# Altium PCB PCB1.PcbDoc
Units mil, origin at the board's own origin, x right, y up, seen from the top; angles counter-clockwise.
Board outline 1970.47 x 3548.03 mil, 4 copper layers (Top Layer, GND, VCC, Bottom Layer), stack 61.811 mil thick; 45 components, 44 nets, 212 pads, 77 vias.
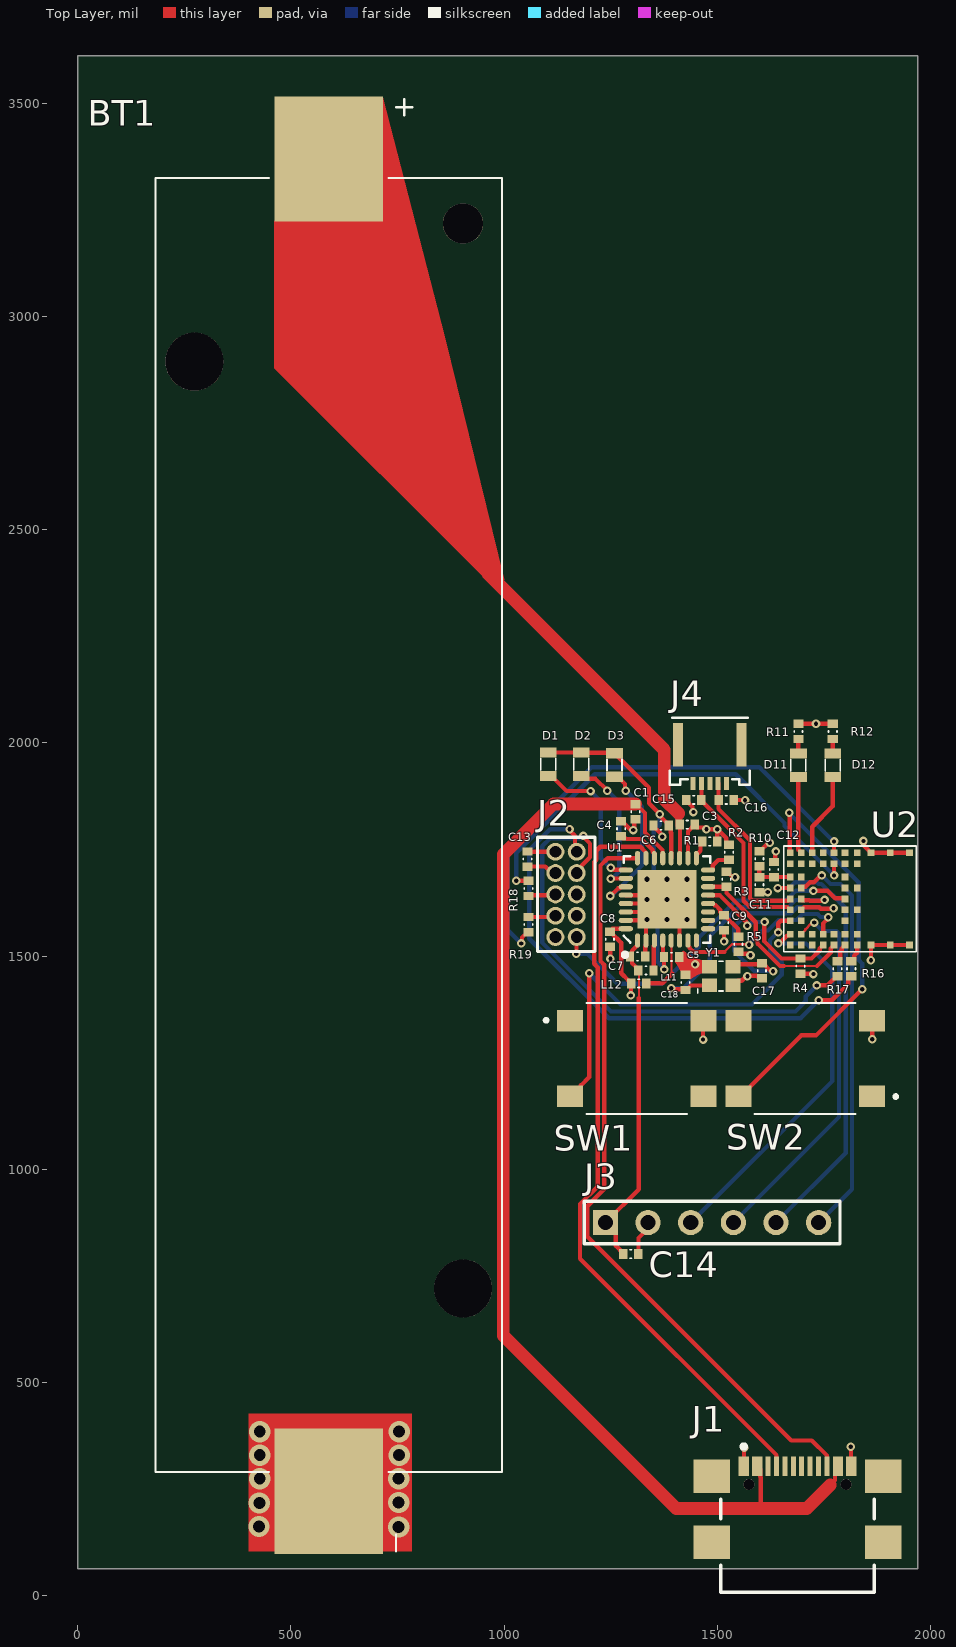
[diagram p0: Top Layer view]
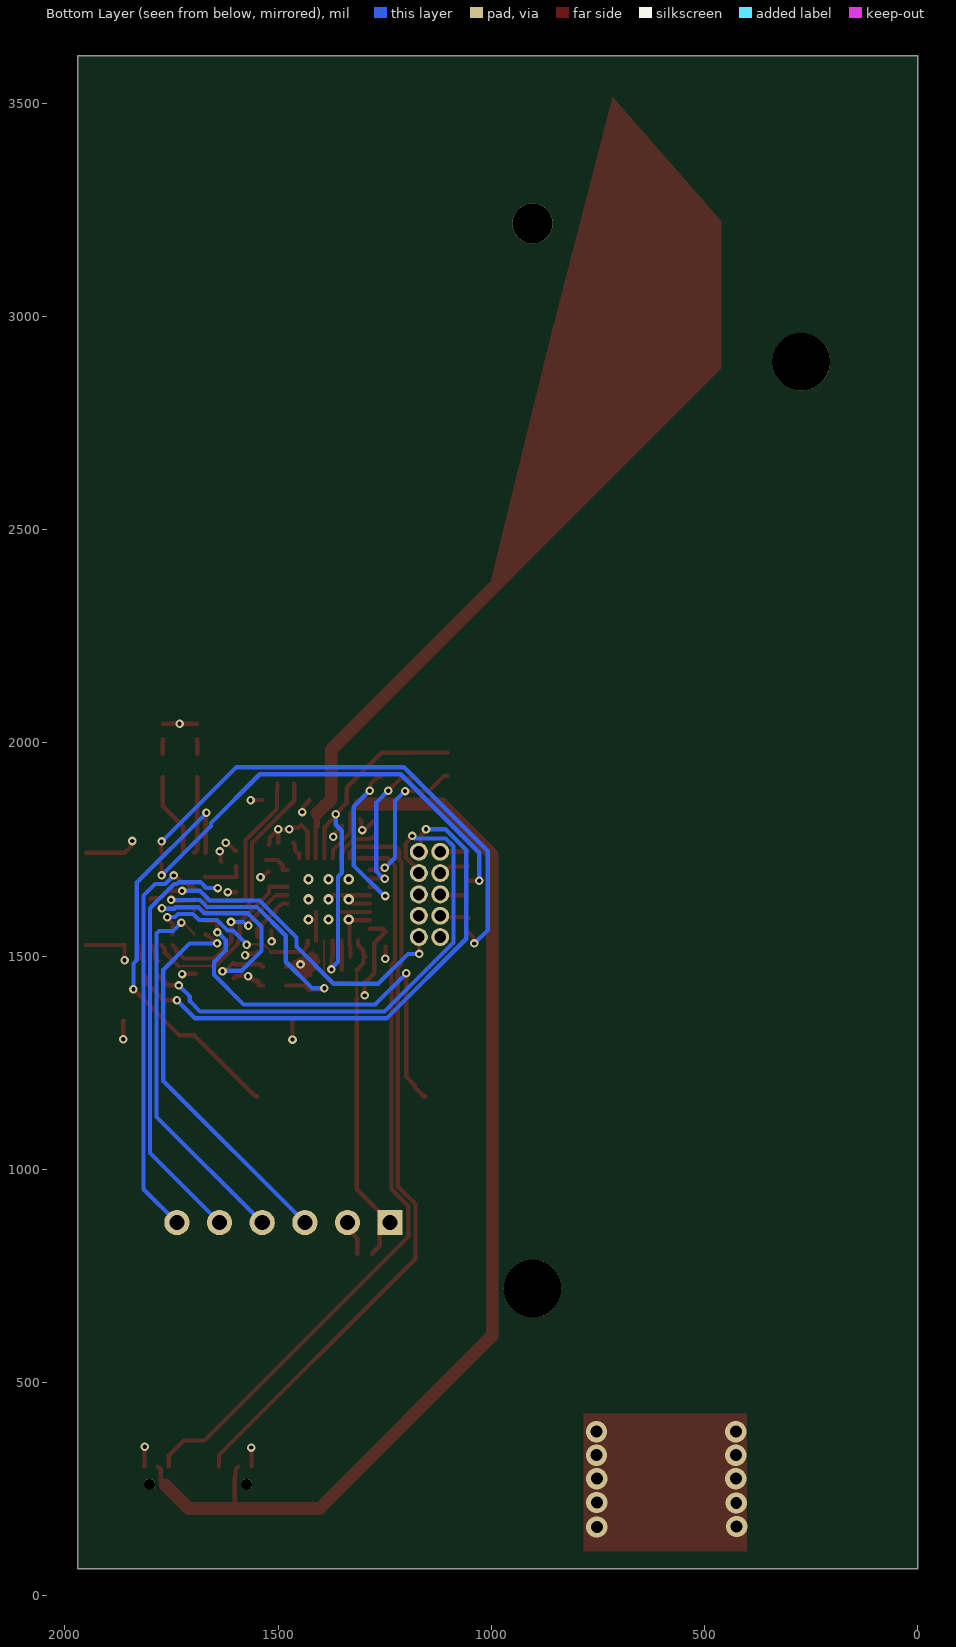
[diagram p1: Bottom Layer view, seen from below]
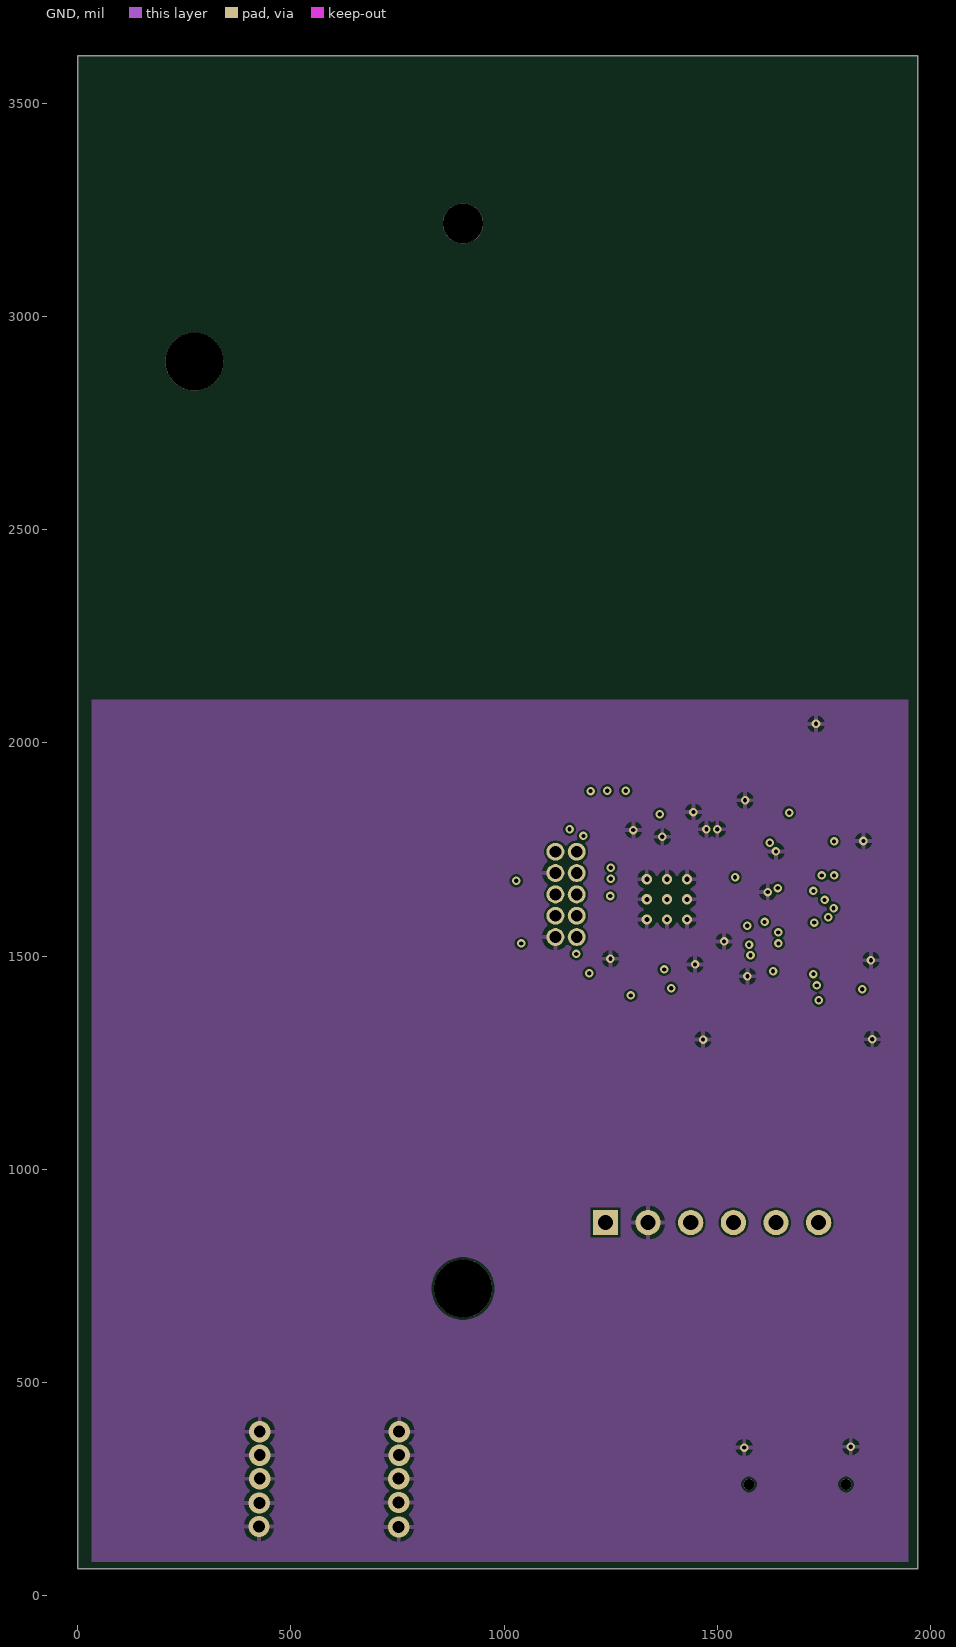
[diagram p2: GND]
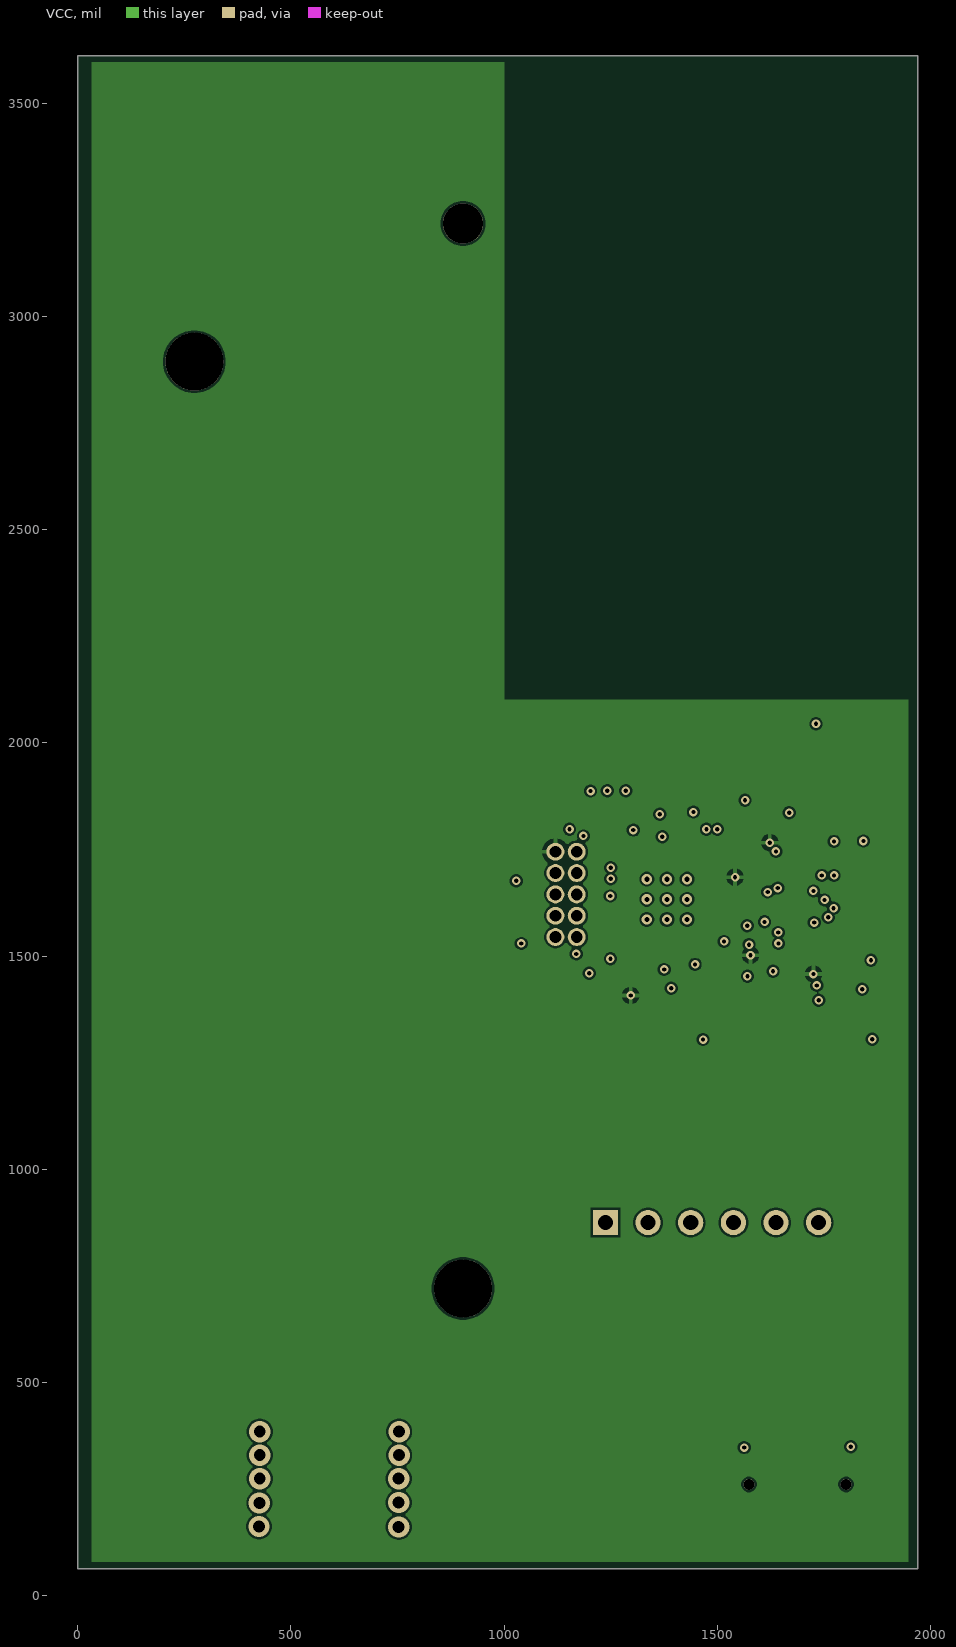
[diagram p3: VCC]
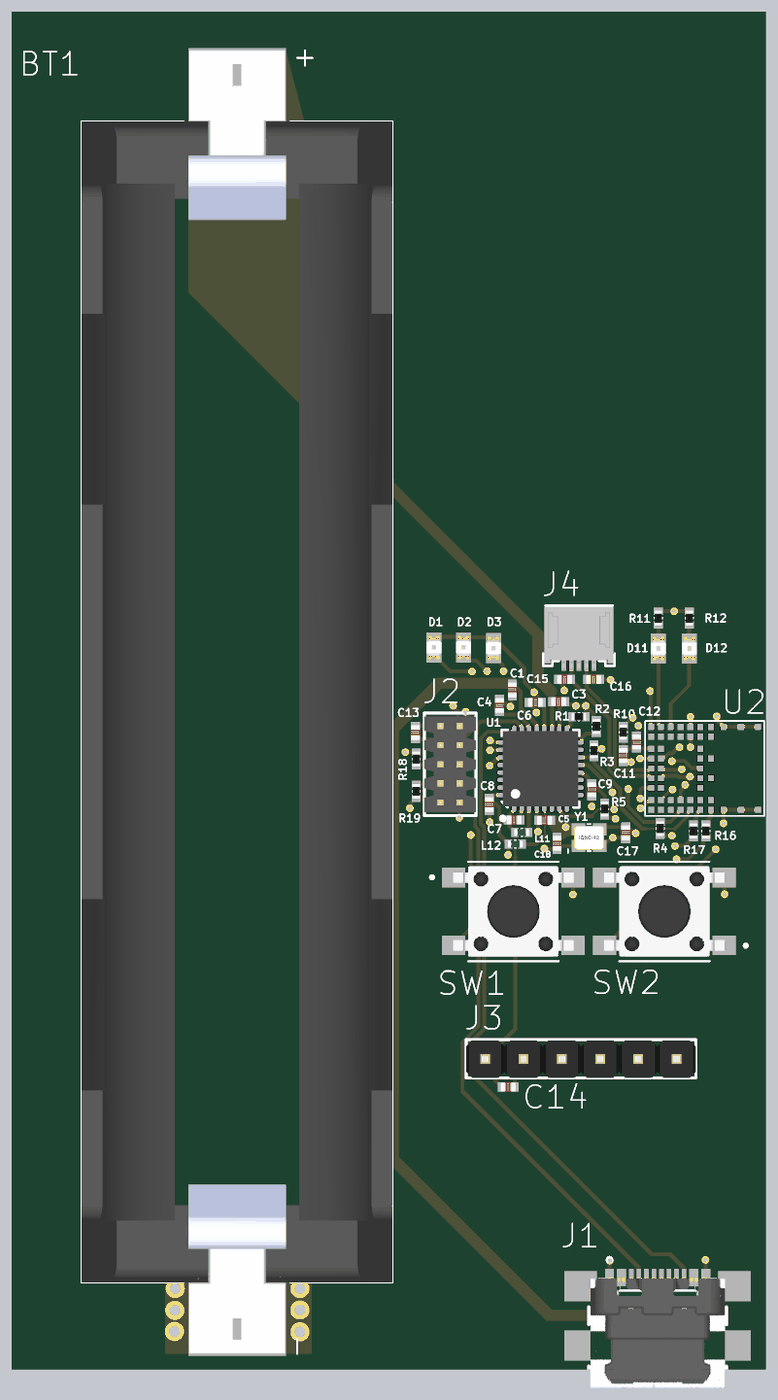
[diagram p4: 3D render of the assembled board from above, using the file's embedded part models]

## Layer stack, top to bottom
Top Solder: solder mask 0.3937, SM-001, Dk 4
Top Layer: signal copper 1.378
Prepeg_Top1: prepreg 7.0866, PP-021, Dk 4.7
Prepeg_Top2: prepreg 7.0866, PP-021, Dk 4.7
GND: signal copper 1.378
Core Dielectric: core 27.9528, FR-4, Dk 4.8
VCC: signal copper 1.378
Prepeg_Bottom2: prepreg 7.0866, PP-021, Dk 4.7
Prepeg_Bottom1: prepreg 7.0866, PP-021, Dk 4.7
Bottom Layer: signal copper 1.378
Bottom Solder: solder mask 0.3937, SM-001, Dk 4

## Board outline
0,63.19 1970.47,63.19 1970.47,3611.22 0,3611.22

## Design rules (kind name [scope] priority, off if disabled: settings)
Clearance [All] p1: gap=5 ignorepadtopadclearanceinfootprint=FALSE except(9: Arc-Hole Track-Hole SMDPad-Hole)
HoleSize [All] p1: absolutevalues=TRUE maxlimit=10000 minlimit=9.84 maxpercent=80.000 minpercent=20.000
MinimumAnnularRing [All] p1: minimumring=5
MinimumSolderMaskSliver [All] p1: minsoldermaskwidth=5
PolygonConnect [All] p1: connectstyle=Relief reliefconductorwidth=10 reliefentries=4 polygonreliefangle="90 Angle" airgapwidth=10
RoutingVias [All] p1: holewidth=28 width=5 viastyle="Through Hole" minholewidth=5.91 minwidth=4 maxholewidth=3937.01 maxwidth=5000
SilkToSilkClearance [All] p1: silktosilkclearance=5
SilkToSolderMaskClearance [IsPad] p1: minsilkscreentomaskgap=5 clearancetoexposedcopper=TRUE
SolderMaskExpansion [All] p1: expansion=0 istentingtop=FALSE
SupplyNets "Schematic Supply Nets_3" [InNet('VCC2')] p1: voltage=0.000
SupplyNets "Schematic Supply Nets_2" [InNet('GND')] p2: voltage=0.000
SupplyNets "Schematic Supply Nets_1" [InNet('VSYS')] p3: voltage=0.000
SupplyNets "Schematic Supply Nets" [InNet('VCC1')] p4: voltage=0.000
Width [All] p1: maxlimit=30 minlimit=5 preferedwidth=10
26 further rules are at their usual default settings.

## Classes and differential pairs
component class U_Zasilanie: BT1 C1 C3 C4 C5 C6 C7 C8 C9 D1 D2 D3 J1 L11 L12 R1 R2 R3 R4 R5 U1
component class U_MCU: C11 C12 C13 C14 C15 C16 C17 C18 D11 D12 J2 J3 J4 R10 R11 R12 R16 R17 R18 R19 SW1 SW2 U2 Y1

## Components (designator, comment, footprint, x,y, rotation, side; value= is the part's Value field where it differs from the comment)
BT1 "1042" BAT_1042 588.84,1807.09 r90 top
C1 "1uF" 0402C 1308.07,1838.58 r270 top
C3 "2,2uF" 0402C 1429.13,1808.07 r0 top
C4 "1uF" 0402C 1274.61,1798.23 r270 top
C5 "10uF" 0402C 1392.72,1498.03 r180 top
C6 "10uF" 0402C 1368.11,1806.1 r0 top
C7 "10uF" 0402C 1312.99,1499.02 r180 top
C8 "10uF" 0402C 1248.03,1539.37 r90 top
C9 "100nF" 0402C 1515.75,1577.76 r270 top
C11 "10uF" 0402C 1598.43,1667.32 r90 top
C12 "100nF" 0402C 1632.87,1702.76 r270 top
C13 "100nF" 0402C 1055.12,1727.36 r270 top
C14 "100nF" 0402C 1297.24,801.18 r0 top
C15 "1uF" 0402C 1444.88,1866.14 r180 top
C16 "1uF" 0402C 1520.67,1866.14 r180 top
C17 "12pF" 0402C 1604.33,1465.55 r90 top
C18 "12pF" 0402C 1425.2,1437.99 r270 top
D1 "LED" 0603LED_RED 1103.35,1949.8 r90 top
D2 "LED" 0603LED_RED 1181.1,1949.8 r90 top
D3 "LED" 0603LED_RED 1258.86,1947.83 r90 top
D11 "LED" 0603LED_RED 1689.96,1946.85 r270 top
D12 "LED" 0603LED_RED 1770.67,1946.85 r270 top
J1 "USB4110-GF-A" FP-USB4110-GF-A-MFG 1687.99,158.46 r0 top
J2 "Cortex Debug Conn_UART" "Cortex Debug Connector - THT" 1145.28,1644.49 r0 top
J3 "HDR_2.54_6x1" "HDR 2.54MM 1x6" 1237.6,875 r0 top
J4 "Compatible with Nordic NFC antenna" FPC_05P-0.5mm-RA-SMD 1521.65,1904.53 r180 top value="FPC 0.5mm RA SMD"
L11 "2,2uH" 0402L 1332.68,1466.54 r0 top
L12 "2,2uH" 0402L 1315.94,1436.02 r0 top
R1 "0R" 0402R 1482.28,1768.7 r0 top
R2 "250k - 500k" 0402R 1527.56,1743.11 r90 top
R3 "10k" 0402R 1521.65,1680.12 r270 top
R4 "10k" 0402R 1694.88,1476.38 r90 top
R5 "0R" 0402R 1549.21,1527.56 r270 top
R10 "0R" 0402R 1598.43,1728.35 r90 top
R11 "1,5k" 0402R 1689.96,2026.57 r90 top
R12 "1,5k" 0402R 1770.67,2026.57 r90 top
R16 "100R" 0402R 1813.98,1470.47 r270 top
R17 "100R" 0402R 1781.5,1470.47 r270 top
R18 "100R" 0402R 1057.09,1658.46 r90 top
R19 "100R" 0402R 1057.09,1573.82 r270 top
SW1 "SWITCH_TACT" "TACT - SMD" 1311.02,1259.84 r0 top
SW2 "SWITCH_TACT" "TACT - SMD" 1705.71,1259.84 r180 top
U1 "nPM1304-QEAA" Nordic_QFN50P500X500X90-33N 1381.89,1632.87 r90 top
U2 "BL54L15u_Ant" "Ezurio, BL54L15u Module, Antenna, Platform Side" 1655.51,1509.84 r0 top
Y1 "XTAL 2.0 1.6" "XTAL 2.0 1.6" 1508.86,1452.76 r0 top

## Footprints (in the part's own frame and the unit in brackets; to place one, negate y for a bottom-side part, rotate by r counter-clockwise, add the part's x,y. Pads: shape width x height; smd on the part's side, far side on the other; paste and mask are expansions set on the pad)
0402C [mm]
  rect 0.5x0.6 smd: 1(0.45,0) 2(-0.45,0)
  silkscreen extent -0.05,-0.25 0.05,0.25, body extent -0.5,-0.3 0.5,0.3, height 0.2
0402L [mm]
  rect 0.5x0.6 smd: 1(0.45,0) 2(-0.45,0)
  silkscreen extent -0.05,-0.25 0.05,0.25, body extent -0.51,-0.25 0.51,0.25, height 0.52
0402R [mm]
  rect 0.5x0.6 smd: 1(0.45,0) 2(-0.45,0)
  silkscreen extent -0.05,-0.25 0.05,0.25, body extent -0.5,-0.25 0.5,0.25, height 0.3
0603LED_RED [mm]
  rect 0.6x1 smd: 1(-0.7,0) 2(0.7,0)
  silkscreen extent -0.35,-0.45 0.35,0.45, body extent -0.8,-0.4 0.8,0.4, height 0.55
BAT_1042 [mm]
  rect 7.46x6.47 smd: N(-39.67,0) P(39.67,0)
  round 3.45 hole 3.45 unplated: ""(-27.6,-8) ""(27.6,8)
  round 2.39 hole 2.39 unplated: ""(35.82,-8)
  silkscreen extent -43.25,-10.33 43.25,10.33, body extent -43.23,-10.33 43.23,10.33, height 14.86
"Cortex Debug Connector - THT" [mm]
  round 1.067 hole 0.7: 1(-0.635,2.54) 2(0.635,2.54) 3(-0.635,1.27) 4(0.635,1.27) 5(-0.635,0) 6(0.635,0) 7(-0.635,-1.27) 8(0.635,-1.27) 9(-0.635,-2.54) 10(0.635,-2.54)
  silkscreen extent -1.7,-3.4 1.73,3.4, body extent -1.71,-3.17 1.71,3.17, height 6.34
"Ezurio, BL54L15u Module, Antenna, Platform Side" [mm] "Ezurio, BL54L15u Module, Platform Side"
  rect 0.4x0.4 smd paste+0 mask+0.051: 1(0.4,5.9) 2(1.05,5.9) 3(0.4,5.25) 4(1.05,5.25) 5(0.4,4.45) 6(1.05,4.45) 7(0.4,3.8) 8(1.05,3.8) 9(0.4,3.15) 10(1.05,3.15) 11(0.4,2.5) 12(1.05,2.5) 13(0.4,1.85) 14(1.05,1.85) 15(0.4,1.05) 16(1.05,1.05) 17(0.4,0.4) 18(1.05,0.4) 19(1.7,0.4) 20(1.7,1.05) 21(2.35,0.4) 22(2.35,1.05) 23(3,0.4) 24(3,1.05) 25(3.65,0.4) 26(3.65,1.05) 27(4.375,0.4) 28(4.375,1.05) 29(3.65,1.85) 30(3.65,2.5) 31(4.375,2.5) 32(3.65,3.15) 33(3.65,3.8) 34(4.375,3.8) 35(3.65,4.45) 36(4.375,5.25) 37(4.375,5.9) 38(3.65,5.25) 39(3.65,5.9) 40(3,5.25) 41(3,5.9) 42(2.35,5.25) 43(2.35,5.9) 44(1.7,5.25) 45(1.7,5.9) G1(5.2,5.9) G2(6.35,5.9) G3(7.5,5.9) G4(5.2,0.4) G5(6.35,0.4) G6(7.5,0.4)
  Top Layer pour cut-out: 4.9,5.65 4.9,5.65 4.9,0.65 7.9,0.65 7.9,5.65
  silkscreen extent 0,0 7.9,6.3, body extent 0,0 7.9,6.3, height 1.75
FP-USB4110-GF-A-MFG [mm]
  rect 2.18x2 smd paste+0 mask+0: 1(-5.11,3.105) 2(5.11,3.105) 3(-5.11,-0.825) 4(5.11,-0.825)
  rect 0.6x1.15 smd paste+0 mask+0: A1-B12(-3.2,3.68) A4-B9(-2.4,3.68) B1-A12(3.2,3.68) B4-A9(2.4,3.68)
  rect 0.3x1.15 smd paste+0 mask+0: A5(-1.25,3.68) A6(-0.25,3.68) A7(0.25,3.68) A8(1.25,3.68) B5(1.75,3.68) B6(0.75,3.68) B7(-0.75,3.68) B8(-1.75,3.68)
  round 0.65 hole 0.65 unplated paste-2539.97 mask+0: ""(-2.89,2.605) ""(2.89,2.605)
  silkscreen extent -4.57,-3.83 4.57,4.99, body extent -6.3,-3.92 6.3,4.36, height 0.25
FPC_05P-0.5mm-RA-SMD [mm] "FPC, 5-Leads, Pitch 0,5mm"
  rect 0.6x2.6 smd: 0(-0.9,-2.3) 0(2.9,-2.3)
  rect 0.3x0.8 smd mask+0.05: 1(0,0) 2(0.5,0) 3(1,0) 4(1.5,0) 5(2,0)
  silkscreen extent -1.38,-3.93 3.38,0.08, body extent -1.3,-3.85 3.3,0.2, height 1.2
"HDR 2.54MM 1x6" [mm] "Connector; Header; 6 Position"
  rect 1.5x1.5 hole 0.9: 1(0,0)
  round 1.5 hole 0.9: 2(2.54,0) 3(5.08,0) 4(7.62,0) 5(10.16,0) 6(12.7,0)
  silkscreen extent -1.27,-1.27 13.97,1.27, body extent -1.27,-1.28 13.97,1.22, height 10.54
Nordic_QFN50P500X500X90-33N [mm]
  oval 0.85x0.3 smd mask+0.076: 1(-2.45,1.75) 2(-2.45,1.25) 3(-2.45,0.75) 4(-2.45,0.25) 5(-2.45,-0.25) 6(-2.45,-0.75) 7(-2.45,-1.25) 8(-2.45,-1.75) 17(2.45,-1.75) 18(2.45,-1.25) 19(2.45,-0.75) 20(2.45,-0.25) 21(2.45,0.25) 22(2.45,0.75) 23(2.45,1.25) 24(2.45,1.75)
  oval 0.3x0.85 smd mask+0.076: 9(-1.75,-2.45) 10(-1.25,-2.45) 11(-0.75,-2.45) 12(-0.25,-2.45) 13(0.25,-2.45) 14(0.75,-2.45) 15(1.25,-2.45) 16(1.75,-2.45) 25(1.75,2.45) 26(1.25,2.45) 27(0.75,2.45) 28(0.25,2.45) 29(-0.25,2.45) 30(-0.75,2.45) 31(-1.25,2.45) 32(-1.75,2.45)
  rect 3.5x3.5 smd: 33(0,0)
  silkscreen extent -3.42,-2.57 2.57,2.62, body extent -2.5,-2.5 2.5,2.5, height 0.9
"TACT - SMD" [mm]
  rect 1.55x1.3 smd: 1(-3.975,2.25) 2(3.975,2.25) 3(-3.975,-2.25) 4(3.975,-2.25)
  silkscreen extent -5.5,-3.3 3,3.3, body extent -4,-3 4,3, height 5
"XTAL 2.0 1.6" [mm]
  rect 0.9x0.8 smd: 1(-0.7,-0.55) 2(0.7,-0.55) 3(0.7,0.55) 4(-0.7,0.55)
  silkscreen extent -1.4,-1.02 0.13,0.89, body extent -1,-0.8 1,0.8, height 0.51

## Part data
BT1: "SMT Holder for 18650 Battery", Package="NON STANDARD-5 Keystone", Check_prices=https://www.snapeda.com/parts/1042/Keystone/view-part/?ref=eda, MF="Keystone Electronics Corp.", MP=1042, SnapEDA_Link=https://www.snapeda.com/parts/1042/Keystone/view-part/?ref=snap
C1 C3 C4 C5 C6 C7 C8 C9 C11 C12 C13 C14 C15 C16 C17 C18: library part C, "Capacitor"
J1: library part USB-C, "USB-C Connector, CMP-245163-000002-1", Current Rating=3/4.25/1.25/0.25A, Manufacturer=GCT, Package=0, Temperature="-40°C to +85°C", Temperature Range High=+85°C, Temperature Range Low=-40°C, Voltage Rating=20V, Automotive=No, Category=Conn, ComponentLink2Description=Datasheet, ComponentLink2URL=https://gct.co/files/drawings/usb4110.pdf, Conn Orientation="Right Angle", Contact Material=Gold,Nickel, Device Class L1=Connectors, Device Class L2="USB Connectors", Device Class L3=unset, Digikey Description="CONN USB 2.0 TYPE-C R/A SMT", Height=3.46mm, Is Female=yes, Lead Free=Yes, Manufacturer Part Number=USB4110-GF-A, Number Of Contacts=16, Octopart=https://octopart.com/usb4110-gf-a-gct-103941985, RoHS=TRUE, Shielding=true, Standoff Height=0.1mm, Usb Standard="USB 2.0"
J2: "JTAG10 Connector"
J3: "Header 2.54, 6-Pin", LatestRevisionDate=17-Jul-2002, LatestRevisionNote="Re-released for DXP Platform.", Publisher="Altium Limited"
J4: library part NFC_CONN, "0.5mm FPC, 5P,Right Angle SMT,Double Contact,H=1.2mm,White, Tin plated", Manufacturer=WCON, Manufacturer Part Number=5141-05RZDNWR03, Part Number=FPC_05P-0.5mm-RA-SMD, Part number IPS=N.A., Part number NEMS=100500528, Artikkelnr Noca=N.A., Author=rsk, Component Class=Connectors, Component Status=Active, ComponentLink1Description=Datasheet, ComponentLink1URL=N.A., ComponentLink2Description="Supplier link", ComponentLink2URL=N.A., Footprint Doc=FPC_05P-0.5mm-RA-SMD, HelpURL=\\hizz\pro\app9717\Datasheet\connectors\W-CON\5141-05RZDNXX02.pdf, LatestRevisionDate=2024-02-02, Note="(Replaced 5141-05RZDNWR02)", Pad Count=7, Part number Norautron=N.A., PartId=100500528, Published=2015-06-22, Supplier 1=Cabcon, Supplier 2=N.A., Supplier Part Number 1=5141-05RZDNWR03, Supplier Part Number 2=N.A., System=Connector
L11 L12: library part L, "Inductor"
R1 R2 R3 R4 R5 R10 R11 R12 R16 R17 R18 R19: library part R, "Resistor"
SW1 SW2: "Switch tact"
U1: library part nPM1304_QEAA, "Li-Ion/Li-Polymer USB-C battery charger with high efficiency buck regulators, LDOs or load switches, LED drivers, TWI and VBUSOUT", Manufacturer="Nordic Semiconductor", Part number IPS=N.A., Part number NEMS=102000396, Artikkelnr Noca=N.A., Author=eisk, Component Class=Nordic_Devices, Component Status=Active, ComponentLink1Description=Datasheet, ComponentLink1URL=N.A., ComponentLink2Description="Supplier link", ComponentLink2URL=N.A., Footprint Doc=QFN-32, HelpURL=N.A., LatestRevisionDate=2025-03-07, Manufacturer Part Number=nPM1304-QEAA, Pad Count=33, Part Number=nPM1304-QEAA, Part number Norautron=N.A., PartId=102000396, Published=2025-03-07, Supplier 1="Nordic Semiconductor", Supplier 2=N.A., Supplier Part Number 1=nPM1304-QEAA, Supplier Part Number 2=N.A.
U2: "453-00223_BL54L15u_Chip ANT_SCH_Symbol_Altium"
Y1: "XTAL"

## Via types
v1: diameter 20, hole 10, Top Layer to Bottom Layer, 58 vias
v2: diameter 50, hole 28, Top Layer to Bottom Layer, 10 vias
v3: diameter 24, hole 12, Top Layer to Bottom Layer, 9 vias

## Nets (pads, with @x,y where several pads share a name; then routed paths per layer and width w, separated by ;. In a path a pad name is that pad's centre, name@x,y a point inside that pad or via, vN(x,y) a via of type N, cw(c..) or ccw(c..) an arc to the next point about the centre after c; other vN are vias at no path point)
CC1: J1.A5 U1.23 | length 1796.3
  Top Layer w10: U1.23 1332.68,1742.97 1319.58,1756.06 1225.5,1756.06 1216.28,1746.84 1216.28,1725.43 1211.22,1720.37 1211.22,1481.72 1219.65,1473.3 1219.65,959.8 1178.15,918.31 1178.15,790.35 1638.78,329.72 J1.A5
CC2: J1.B5 U1.24 | length 1783.9
  Top Layer w10: U1.24 1243.11,1729.33 1226.22,1712.44 1226.22,1487.94 1234.65,1479.51 1234.65,953.15 1194.88,913.39 1194.88,842.52 1673.23,364.17 1721.46,364.17 1756.89,328.74 J1.B5
Fingerprint_RST: J3.5 U2.7 | length 1024.6
  Top Layer w10: v1(1641.73,1659.45) U2.7
  Bottom Layer w10: J3.5 1800.94,1038.35 1800.94,1612.18 1770.42,1642.7 1770.14,1642.7 1743.87,1668.98 1737.26,1668.98 1733.68,1672.56 1733.23,1672.56 1732.56,1673.23 1682.52,1673.23 1668.74,1659.45 v1(1641.73,1659.45)
Fingerprint_RX: J3.4 U2.16 | length 891.8
  Top Layer w6: U2.16 1706.57,1560.9 1706.57,1562.37 1719.94,1575.75 1724.27,1575.75 v1(1726.95,1578.43)
  Bottom Layer w10: J3.4 1785.43,1122.83 1785.43,1552.88 1779.58,1558.74 1746.64,1558.74 v1(1726.95,1578.43)
Fingerprint_TX: J3.3 U2.15 | length 918.9
  Top Layer w10: v1(1643.36,1529.53) 1645.07,1529.53 1663.85,1548.31 1668.39,1548.31 U2.15
  Bottom Layer w10: J3.3 1769.68,1207.09 1769.68,1467.52 1707.68,1529.53 v1(1643.36,1529.53)
Fingerprint_WAKE: J3.6 U2.8 | length 950.3
  Top Layer w10: U2.8 1699.72,1662.32 1706.87,1662.32 1717.48,1672.93 1726.32,1672.93 1742.38,1688.99 v1(1745.09,1688.99)
  Bottom Layer w10: J3.6 1815.94,953.35 1815.94,1642.02 1788.99,1668.98 1765.08,1668.98 v1(1745.09,1688.99)
GND: BT1.N C1.1 C3.1 C4.2 C5.2 C6.2 C7.2 C8.2 C9.1 C11.2 C12.2 C13.1 C14.1 C15.1 C16.2 C17.2 C18.2 J1.A1-B12 J1.B1-A12 J2.3 J2.9 J3.2 R1.1 R2.1 R11.1 R12.1 SW1.2 SW2.3 U1.2 U1.6 U1.18 U1.28 U1.29 U1.30 U1.31 U1.33 U2.G1 U2.G2 U2.G3 U2.G4 U2.G5 U2.G6 Y1.2 Y1.4 | length 1987.3
  Top Layer w10: v2(752.95,161.42) v2(752.95,274.61) 753.44,275.1 753.44,329.23 v2(753.94,329.72) v2(753.94,384.84) ; C13.1 1096.46,1709.65 1111.61,1694.49 J2.3 ; C8.2 1248.68,1521 1248.68,1494.07 v1(1249.33,1493.43) ; C4.2 1276.57,1815.94 1295.33,1797.19 1301.24,1797.19 v1(1303.15,1795.28) 1305.06,1797.19 1305.06,1817.86 C1.1 ; U1.31 1332.68,1583.66 U1.2 1332.68,1525.1 1330.71,1523.13 C7.2 C7.2@1331.69,1498.03 ; U1.30 U1.33@1352.36,1603.35 ; U1.29 U1.33@1327.76,1623.03 ; U1.28 1372.05,1642.72 v3(1381.89,1632.87) ; C14.1 1314.96,839.09 1337.6,861.73 J3.2 ; C6.2 1350.39,1804.13 1369.15,1785.38 1369.15,1781.44 v1(1371.06,1779.53) ; C5.2@1410.43,1500 C5.2 1415.28,1493.19 1432.25,1493.19 1445.13,1480.32 v1(1447.83,1480.32) ; U1.6 U1.33@1411.42,1603.35 ; C18.2 1427.17,1455.71 1445.92,1474.46 1445.92,1478.4 v1(1447.83,1480.32) ; C15.1 1427.17,1864.17 1441.98,1849.35 1441.98,1839.51 v1(1443.9,1837.6) ; U1.18 1431.1,1792.32 C3.1 1446.85,1806.1 1451.69,1801.26 1467.69,1801.26 1471.7,1797.24 v1(1500,1797.24) ; v1(1466.54,1304.13) 1466.54,1347.44 SW1.2 ; Y1.4 1475.39,1480.32 v1(1447.83,1480.32) ; R1.1@1500,1765.75 v1(1500,1797.24) ; v1(1515.77,1534.21) C9.1@1515.76,1560.03 ; R2.1@1522.21,1760.83 1520.75,1762.28 1520.75,1776.5 v1(1500,1797.24) ; Y1.2 1546.51,1431.1 1546.51,1439.22 1549.13,1441.85 1557.25,1441.85 1567.93,1452.52 v1(1570.63,1452.52) ; C16.2 1538.88,1865.65 1564.47,1865.65 v1(1564.96,1865.16) ; J1.A1-B12 1562.5,303.84 1562.5,346.95 v1(1562.99,347.44) ; v1@1570.63,1453.74 1591.66,1453.74 1592.72,1452.68 1599.49,1452.68 C17.2 ; C11.2 1598.64,1649.82 1617.89,1649.82 v1(1618.11,1650.04) ; C12.2 1635.54,1723.13 1635.54,1743.41 v1(1637.45,1745.32) ; R11.1 v1(1731.3,2044.29) R12.1 ; v1(1812.99,349.41) 1813.48,348.92 1813.48,303.84 J1.B1-A12 ; v1(1842.52,1769.68) 1844.43,1767.77 1844.43,1757.93 U2.G1 U2.G2 U2.G3 ; v1(1860.24,1490.16) U2.G4 U2.G5 U2.G6 ; SW2.3 1863.19,1347.44 v1(1863.19,1305.12)
  other v1: 1474.41,1797.24
  other v2: 425.2,162.4 426.18,217.52 752.95,218.5 427.17,274.61 427.17,329.72 427.17,384.84
  other v3: 1334.65,1585.63 1381.89,1585.63 1429.13,1585.63 1334.65,1632.87 1429.13,1632.87 1334.65,1680.12 1381.89,1680.12 1429.13,1680.12
JTAG_RX: R19.1 U2.41 | length 1209.5
  Top Layer w10: v1(1040.35,1529.53) 1042.27,1531.44 1042.27,1543.25 1055.12,1556.1 R19.1 ; U2.41 v1(1773.62,1768.7)
  Bottom Layer w10: v1(1040.35,1529.53) 1008.54,1561.34 1008.54,1745.75 1205.71,1942.91 1598.15,1942.91 1772.36,1768.7 v1(1773.62,1768.7)
JTAG_TX: R18.1 U2.40 | length 1045.6
  Top Layer w10: v1(1028.54,1676.18) R18.1 ; v1(1773.62,1688.98) U2.40
  Bottom Layer w10: v1(1028.54,1676.18) 1028.54,1742.13 1212.6,1926.18 1543.25,1926.18 1657.48,1811.95 1657.48,1805.12 v1(1773.62,1688.98)
NetBT1_P: BT1.P C3.2 U1.19 | length 862.6
  Top Layer w10: C3.2 1412.58,1806.91 U1.19@1412.58,1729.33
  Top Layer w15: C3.2@1409.45,1806.1 1409.45,1833.92
  Top Layer w30: 960.63,2403.54 960.63,2398.62 1375.67,1983.58 1375.67,1867.7 1409.45,1833.92
NetC4_1: C4.1 U1.22 | length 107.8
  Top Layer w10: C4.1 1279.45,1775.67 1286.21,1775.67 1287.28,1774.61 1322.25,1774.61 1348.58,1748.27 1348.58,1744.43 1352.36,1740.65 U1.22
NetC9_2: C9.2 R5.2 U1.12 | length 115.4
  Top Layer w10: U1.12 1489.66,1623.03 1493.44,1619.25 1495.76,1619.25 1506.97,1608.05 1506.97,1603.27 1511.81,1598.43 C9.2@1515.75,1598.43 ; C9.2@1515.75,1596.46 1549.21,1562.99 R5.2
NetC11_1: C11.1 C12.1 R10.2 U2.5 | length 98.4
  Top Layer w10: R10.2 C11.1 C12.1 U2.5
NetC15_2: C15.2 J4.4 U2.11 | length 432.6
  Top Layer w10: C15.2@1462.6,1864.17 1487.95,1838.82 1561.61,1765.16 1561.61,1629.41 1576.26,1614.76 1664.76,1614.76 U2.11 ; C15.2 J4.4
NetC16_1: C16.1 J4.2 U2.9 | length 398.6
  Top Layer w10: J4.2 1501.97,1894.68 1502.95,1893.7 C16.1 1502.95,1845.03 1576.61,1771.37 1576.61,1635.62 1582.47,1629.76 1667.17,1629.76 U2.9
NetD1_1: D1.1 U1.25 | length 351.2
  Top Layer w10: D1.1 1111.22,1922.24 1146.65,1886.81 v1(1202.76,1886.81) ; v1(1250,1706.69) 1252.71,1706.69 1257.28,1702.12 1285.09,1702.12 U1.25
  Bottom Layer w10: v1(1202.76,1886.81) 1226.38,1863.19 1226.38,1730.32 v1(1250,1706.69)
NetD2_1: D2.1 U1.26 | length 339.2
  Top Layer w10: D2.1 1187.91,1915.43 1214.49,1915.43 v1(1242.13,1887.8) ; v1(1250,1681.1) 1250.64,1681.74 1285.09,1681.74 U1.26
  Bottom Layer w10: v1(1242.13,1887.8) 1270,1859.92 1270,1698.41 1252.69,1681.1 v1(1250,1681.1)
NetD3_1: D3.1 U1.27 | length 388.4
  Top Layer w10: v1(1249.02,1640.75) 1266.89,1658.62 1270.34,1658.62 1274.12,1662.4 U1.27 ; D3.1 1266.73,1920.28 1283.52,1903.49 1283.52,1889.71 v1(1285.43,1887.8)
  Bottom Layer w10: v1(1249.02,1640.75) 1251.61,1640.75 1323.15,1712.28 1323.15,1850.08 v1(1285.43,1887.8)
NetD11_1: D11.1 R11.2 | length 34.4
  Top Layer w10: D11.1 R11.2
NetD11_2: D11.2 U2.2 | length 180
  Top Layer w10: D11.2 1689.96,1749.02 U2.2
NetD12_1: D12.1 R12.2 | length 34.4
  Top Layer w10: D12.1 R12.2
NetD12_2: D12.2 U2.45 | length 197.1
  Top Layer w10: U2.45 1722.44,1803.19 1770.67,1851.42 D12.2
NetJ2_2: J2.2 R16.1 | length 1262.3
  Top Layer w10: v1(1153.54,1797.24) 1153.54,1794.54 1166.02,1782.06 1166.02,1748.74 J2.2 ; v1(1737.57,1396.29) 1768.1,1396.29 1807.17,1435.35 1807.17,1447.91 1812.01,1452.76 R16.1
  Bottom Layer w10: v1(1153.54,1797.24) 1107.97,1797.24 1059.06,1748.33 1059.06,1540.65 1245.37,1354.33 1695.61,1354.33 v1(1737.57,1396.29)
NetJ2_4: J2.4 R17.1 | length 1238.4
  Top Layer w10: J2.4 1170.28,1700.64 1201.28,1731.65 1201.28,1763.53 1186.02,1778.79 v1(1186.02,1781.5) ; v1(1733.27,1431.1) 1733.66,1431.5 1758.27,1431.5 1779.53,1452.76 R17.1
  Bottom Layer w10: v1(1186.02,1781.5) 1180.12,1775.59 1107.53,1775.59 1089.27,1757.33 1089.27,1531.65 1250.84,1370.08 1683.07,1370.08 1707.21,1394.22 1707.21,1405.05 v1(1733.27,1431.1)
NetJ2_5: J2.5 R18.2 | length 64.7
  Top Layer w10: R18.2 1058.96,1642.62 1118.41,1642.62 J2.5
NetJ2_7: J2.7 R19.2 | length 69.6
  Top Layer w10: R19.2@1053.15,1588.58 1056.1,1591.54 1117.32,1591.54 J2.7
NetL11_1: L11.1 U1.3 | length 69.7
  Top Layer w10: L11.1@1351.02,1467.16 1351.02,1523.75 1352.48,1525.22 U1.3@1352.48,1536.3
NetL12_1: L12.1 U1.5 | length 148.4
  Top Layer w5: U1.5 1392.74,1535.41 1392.74,1460.67 1394.18,1459.23 1394.18,1459.16
  Top Layer w10: L12.1 1371.04,1436.02 1394.18,1459.16
NetR1_2: R1.2 U1.17 | length 43.6
  Top Layer w10: U1.17 1450.79,1739.67 1451.62,1740.5 1454.11,1740.5 1460.53,1746.92 1460.53,1761.71 R1.2@1464.57,1765.75
NetR2_2: R2.2 U1.16 | length 65.1
  Top Layer w10: U1.16 1488.68,1701.77 1489.52,1702.61 1489.52,1712.95 1501.97,1725.39 R2.2
NetR3_1: R3.1 U1.14 U2.23 | length 433
  Top Layer w5: 1657.04,1476.38 1733.89,1476.38
  Top Layer w10: U1.14 R3.1 1521.65,1647.64 1590.24,1579.06 1590.24,1539.12 1594.33,1535.02 1594.33,1529.06 1647.02,1476.38 1656.24,1476.38 ; 1733.89,1476.38 1765.91,1508.39 1765.91,1517.87 U2.23
NetR4_1: R4.1 U1.13 U2.21 | length 386.2
  Top Layer w10: U1.13 1505.36,1642.72 1567.97,1580.11 1567.97,1572.78 v1(1569.88,1570.87) ; v1(1610.73,1580.04) 1610.24,1579.55 1610.24,1534.37 1650.51,1494.09 R4.1 1720.84,1494.09 1740.32,1513.57 1740.32,1517.87 U2.21
  Bottom Layer w10: v1(1569.88,1570.87) 1572.59,1570.87 1581.76,1580.04 v1(1610.73,1580.04)
NetSW1_3: SW1.3 U2.13 | length 992.2
  Top Layer w10: SW1.3 1159.45,1171.26 1180.04,1191.85 1180.04,1196.77 1199.65,1216.38 v1(1199.65,1459.65) ; v1(1642.55,1555.29) 1642.76,1555.51 1642.76,1576.82 1648.62,1582.68 U2.13
  Bottom Layer w10: v1(1199.65,1459.65) 1272.8,1386.5 1581.12,1386.5 1650.72,1456.1 1650.72,1485.5 1623.36,1512.86 1623.36,1537.81 1640.84,1555.29 v1(1642.55,1555.29)
NetSW2_2: SW2.2 U2.1 | length 973.4
  Top Layer w10: SW2.2 1554.13,1171.26 1696.84,1313.96 1731.29,1313.96 v1(1839.57,1422.24) ; v1(1668.31,1835.63) 1669.78,1834.15 1669.78,1743.6 U2.1
  Bottom Layer w10: v1(1668.31,1835.63) 1831.69,1672.24 1831.69,1490.42 1839.57,1482.54 v1(1839.57,1422.24)
NetU1_7: U1.7 U2.22 | length 434.2
  Top Layer w5: 1516.73,1509.84 1534.45,1527.56 1573.51,1527.56 v1(1574.33,1526.73)
  Top Layer w10: U1.7 1431.1,1525.1 1434.88,1521.32 1434.88,1519 1444.69,1509.19 1516.73,1509.19 ; U2.22 1748.03,1576.03 1759.95,1587.96 v1(1759.95,1590.66)
  Bottom Layer w10: v1(1574.33,1526.73) 1574.33,1528.52 1605.86,1560.04 1619.01,1560.04 1643.62,1584.65 1686.02,1584.65 1699.8,1598.43 1735.24,1598.43 1742.08,1591.59 1759.03,1591.59 v1(1759.95,1590.66)
nRESET: J2.10 U2.32 | length 810.2
  Top Layer w10: v1(1169.29,1504.92) 1169.78,1505.41 1169.78,1544 J2.10 ; v1(1725.39,1652.56) 1726.06,1653.23 1758.3,1653.23 1776.34,1635.19 1797.88,1635.19 U2.32
  Bottom Layer w10: v1(1169.29,1504.92) 1195.87,1504.92 1265.75,1435.04 1370.06,1435.04 1456.96,1521.94 1456.96,1543.13 1543.87,1630.04 1660.55,1630.04 1677.16,1646.65 1677.61,1646.65 1684.18,1653.23 1724.72,1653.23 v1(1725.39,1652.56)
SWDCLK: R17.2 U2.25 | length 45.9
  Top Layer w10: R17.2 1783.46,1488.19 1788.31,1493.03 1788.31,1510.39 1791.5,1513.57 1791.5,1517.87 U2.25
SWDIO: R16.2 U2.27 | length 44.3
  Top Layer w10: R16.2 1815.94,1488.19 1820.79,1493.03 1820.79,1500.65 1827.76,1507.62 U2.27
VBUS: C1.2 J1.A4-B9 J1.B4-A9 U1.21 | length 2754.2
  Top Layer w10: C1.2@1311.02,1854.33 1330.22,1835.14 1330.22,1789.86 1371.7,1748.38 1371.7,1729.68 U1.21 ; 1588.58,203.74 1589.57,204.72 1595.29,210.44 1601.93,217.08 1601.93,277.99 1600.39,279.53 1600.39,279.85 1600.31,279.93 1600.31,296.54 J1.A4-B9 ; 1764.76,259.84 1775.67,270.75 1775.67,296.54 J1.B4-A9
  Top Layer w30: C1.2 1116.14,1856.3 998.03,1738.19 998.03,610.24 1403.54,204.72 1589.57,204.72 1600.31,204.72 1709.65,204.72 1764.76,259.84
VCC1: C7.1 C14.2 J3.1 L11.2 U1.1 | length 800
  Top Layer w5: 1315.95,1401.57 L11.2@1315.95,1466.54
  Top Layer w10: C14.2 1279.53,803.15 1262.13,820.55 1262.13,850.47 J3.1 1315.94,953.35 1315.94,1401.57 ; U1.1 1312.99,1525.1 1300.12,1512.23 1300.12,1503.86 C7.1 1300.12,1494.17 1300.12,1483.35 L11.2@1315.94,1467.52
VCC2: C8.1 C13.2 J2.1 L12.2 R3.2 R4.2 R5.1 R10.1 U1.32 | length 391.1
  Top Layer w10: C13.2 1055.41,1744.78 1119.98,1744.78 J2.1 ; C8.1 1250,1557.09 1254.84,1552.24 1254.84,1550.28 1263.62,1541.5 1263.98,1541.5 1274.61,1530.87 1274.61,1459.65 1291.42,1442.83 1293.39,1442.83 1298.23,1437.99 L12.2 1297.55,1435.35 1297.55,1408.28 v1(1296.87,1407.6) ; C8.1@1253.94,1563.98 U1.32 ; R3.2 1523.62,1697.83 1534.71,1686.75 1539.7,1686.75 v1(1541.61,1684.84) ; R5.1 1553.85,1505.21 1571.81,1505.21 1575.05,1501.97 v1(1577.76,1501.97) ; R10.1 1600.39,1746.06 1618.17,1763.83 1621.12,1763.83 v1(1623.03,1765.75) ; R4.2 1695.37,1458.17 1724.9,1458.17 v1(1725.39,1457.68)
VSYS: C5.1 C6.1 D1.2 D2.2 D3.2 U1.4 U1.20 | length 911.7
  Top Layer w10: D1.2 D2.2 1182.09,1976.38 1257.87,1976.38 D3.2 1339.57,1894.69 1339.57,1858.27 v1(1365.16,1832.68) 1367.07,1830.76 1367.07,1826.83 C6.1@1385.83,1808.07 ; U1.4 1372.39,1536.07 1372.39,1498.38 1372.05,1498.03 1375.12,1494.96 1375.12,1468.62 v1(1375.24,1468.5) ; C6.1@1383.86,1810.04 C6.1@1385.83,1808.07 ; C6.1 C6.1@1385.83,1808.07 ; U1.20 1391.73,1788.46 1390.67,1789.53 1390.67,1803.23 C6.1@1385.83,1808.07
  Bottom Layer w10: v1(1365.16,1832.68) 1365.16,1807.65 1351.06,1793.56 1351.06,1694.81 1359.89,1685.99 1359.89,1486.56 1375.24,1471.21 v1(1375.24,1468.5)
XTAL1: C17.1 U2.12 Y1.3 | length 607.7
  Top Layer w10: Y1.3 1542.62,1480.61 1601.67,1480.61 C17.1 1606.3,1483.27 1623.27,1466.3 1628.81,1466.3 v1(1630.72,1464.39) ; U2.12 1703.19,1614.61 1739,1614.61 1742.64,1610.97 1771.4,1610.97 v1(1772.64,1612.2)
  Bottom Layer w10: v1(1630.72,1464.39) 1629.56,1465.55 1585.89,1465.55 1539.37,1512.07 1539.37,1568.64 1570.77,1600.04 1672.97,1600.04 1687.11,1614.17 1740.7,1614.17 1743.73,1611.14 1771.57,1611.14 v1(1772.64,1612.2)
XTAL2: C18.1 U2.10 Y1.1 | length 629.7
  Top Layer w10: v1(1391.73,1424.21) 1393.65,1422.3 1418.39,1422.3 1420.35,1424.27 C18.1@1420.35,1425.12 ; C18.1 1427.17,1420.28 1437.99,1431.1 Y1.1 ; U2.10 1699.72,1630.98 1715.73,1630.98 1717.11,1629.61 1749.43,1629.61 v1(1751.33,1631.5)
  Bottom Layer w10: v1(1391.73,1424.21) 1420.02,1424.21 1482.41,1486.61 1482.41,1547.38 1550.08,1615.04 1666.76,1615.04 1683.22,1631.5 v1(1751.33,1631.5)
pads on no net: BT1. J1. J1.1 J1.2 J1.3 J1.4 J1.A6 J1.A7 J1.A8 J1.B6 J1.B7 J1.B8 J2.6 J2.8 J4.0 J4.1 J4.3 J4.5 SW1.1 SW1.4 SW2.1 SW2.4 U1.8 U1.9 U1.10 U1.11 U1.15 U2.3 U2.4 U2.6 U2.14 U2.17 U2.18 U2.19 U2.20 U2.24 U2.26 U2.28 U2.29 U2.30 U2.31 U2.33 U2.34 U2.35 U2.36 U2.37 U2.38 U2.39 U2.42 U2.43 U2.44

## Polygon pours and split planes (outlines as drawn)
GND on GND "GND_L02_P000" (solid, pour order 0): 1008.86,2100.39 1947.83,2100.39 1947.83,79.72 33.46,79.72 33.46,2100.39
VCC2 on VCC "VCC2_L03_P001" (solid, pour order 1): 1000,3595.47 1000,2099.41 1001.97,2101.38 1947.83,2101.38 1947.83,79.72 33.46,79.72 33.46,3595.47

## Other copper
Top Layer:
  rectangle net GND: 400.59,104.33 784.45,427.17
  region net GND: 1420.28,1511.81 1439.96,1499.02 1463.58,1490.16 1463.58,1459.65 1451.77,1454.72 1436.02,1445.87 1416.34,1465.55 1413.39,1465.55 1407.48,1477.36 1400.59,1488.19
  region net NetBT1_P: 715.55,3513.78 861.22,2951.77 1000,2381.89 957.68,2381.89 461.61,2877.95 461.61,3222.44